# Altium PCB PCB1.PcbDoc
Units mm, origin at the board's own origin, x right, y up, seen from the top; angles counter-clockwise.
Board outline 80.01 x 80.01 mm, 2 copper layers (Top Layer, Bottom Layer), stack 1.671 mm thick; 36 components, 24 nets, 141 pads, 4 vias.
Unrouted connection lines stored in the file: 68.
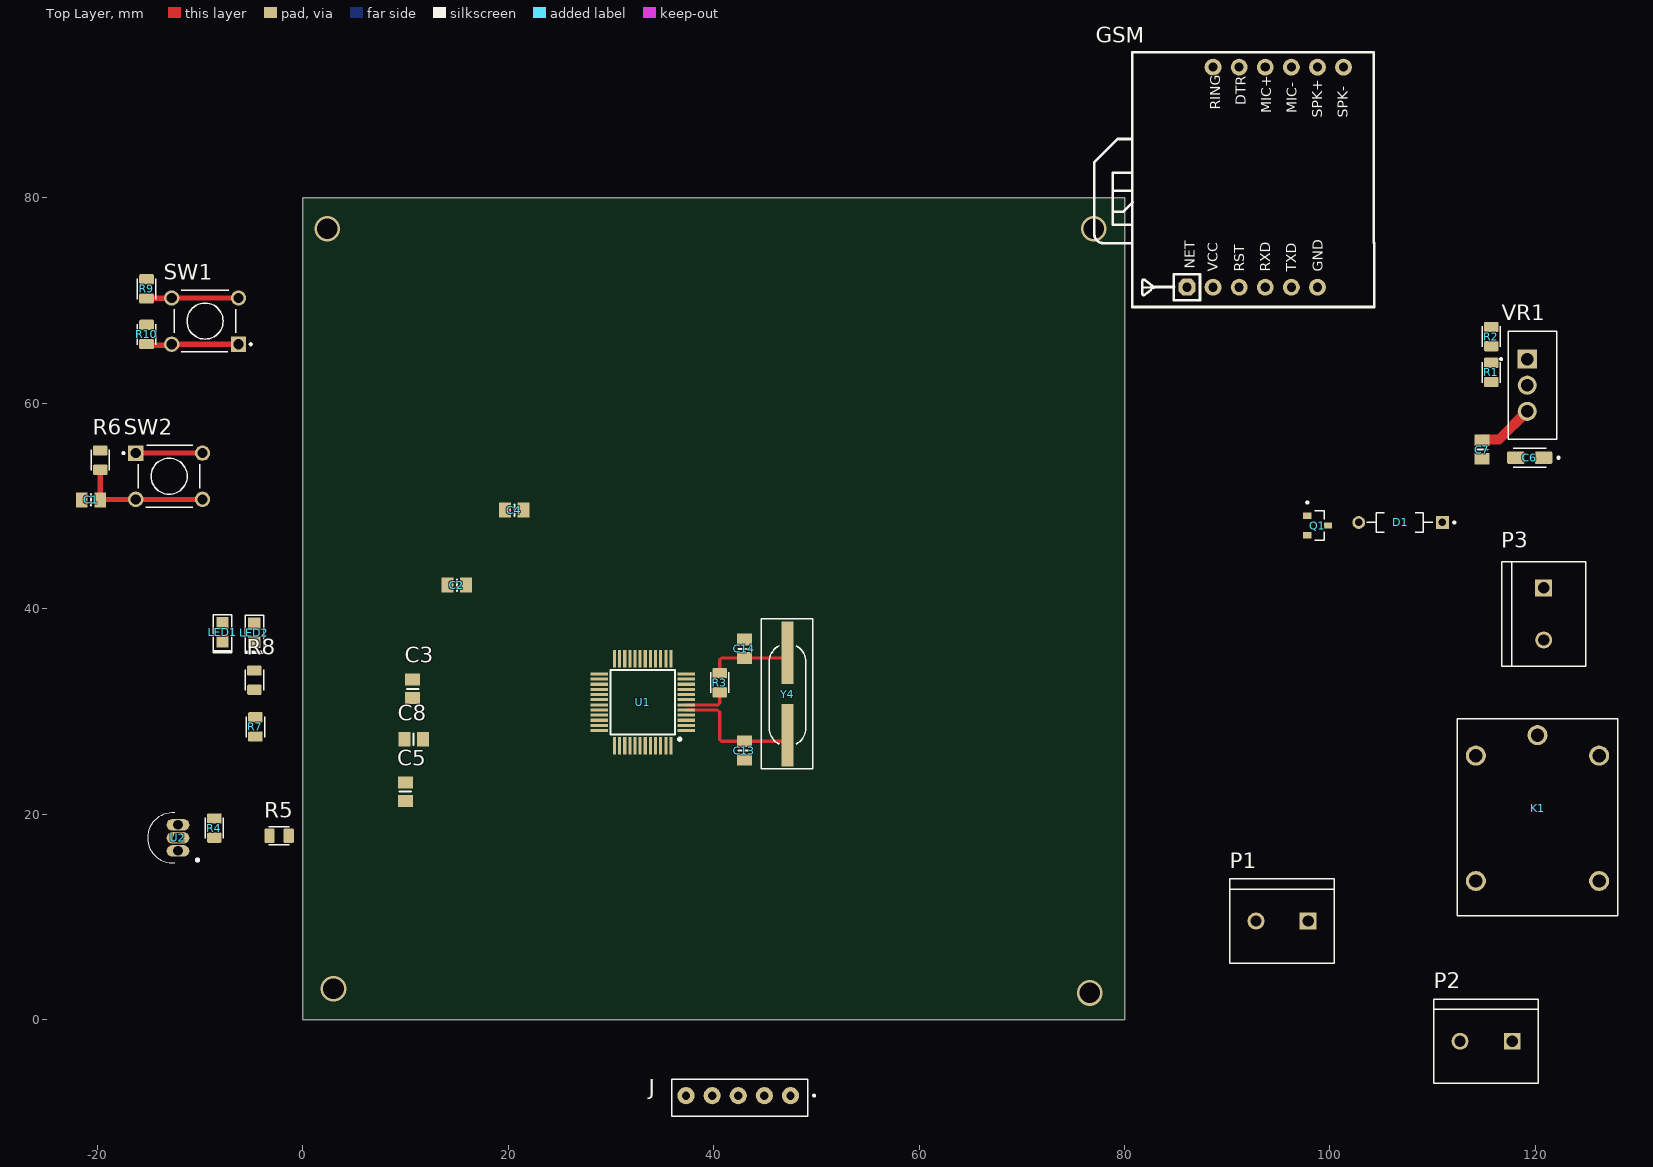
[diagram p0: Top Layer view]
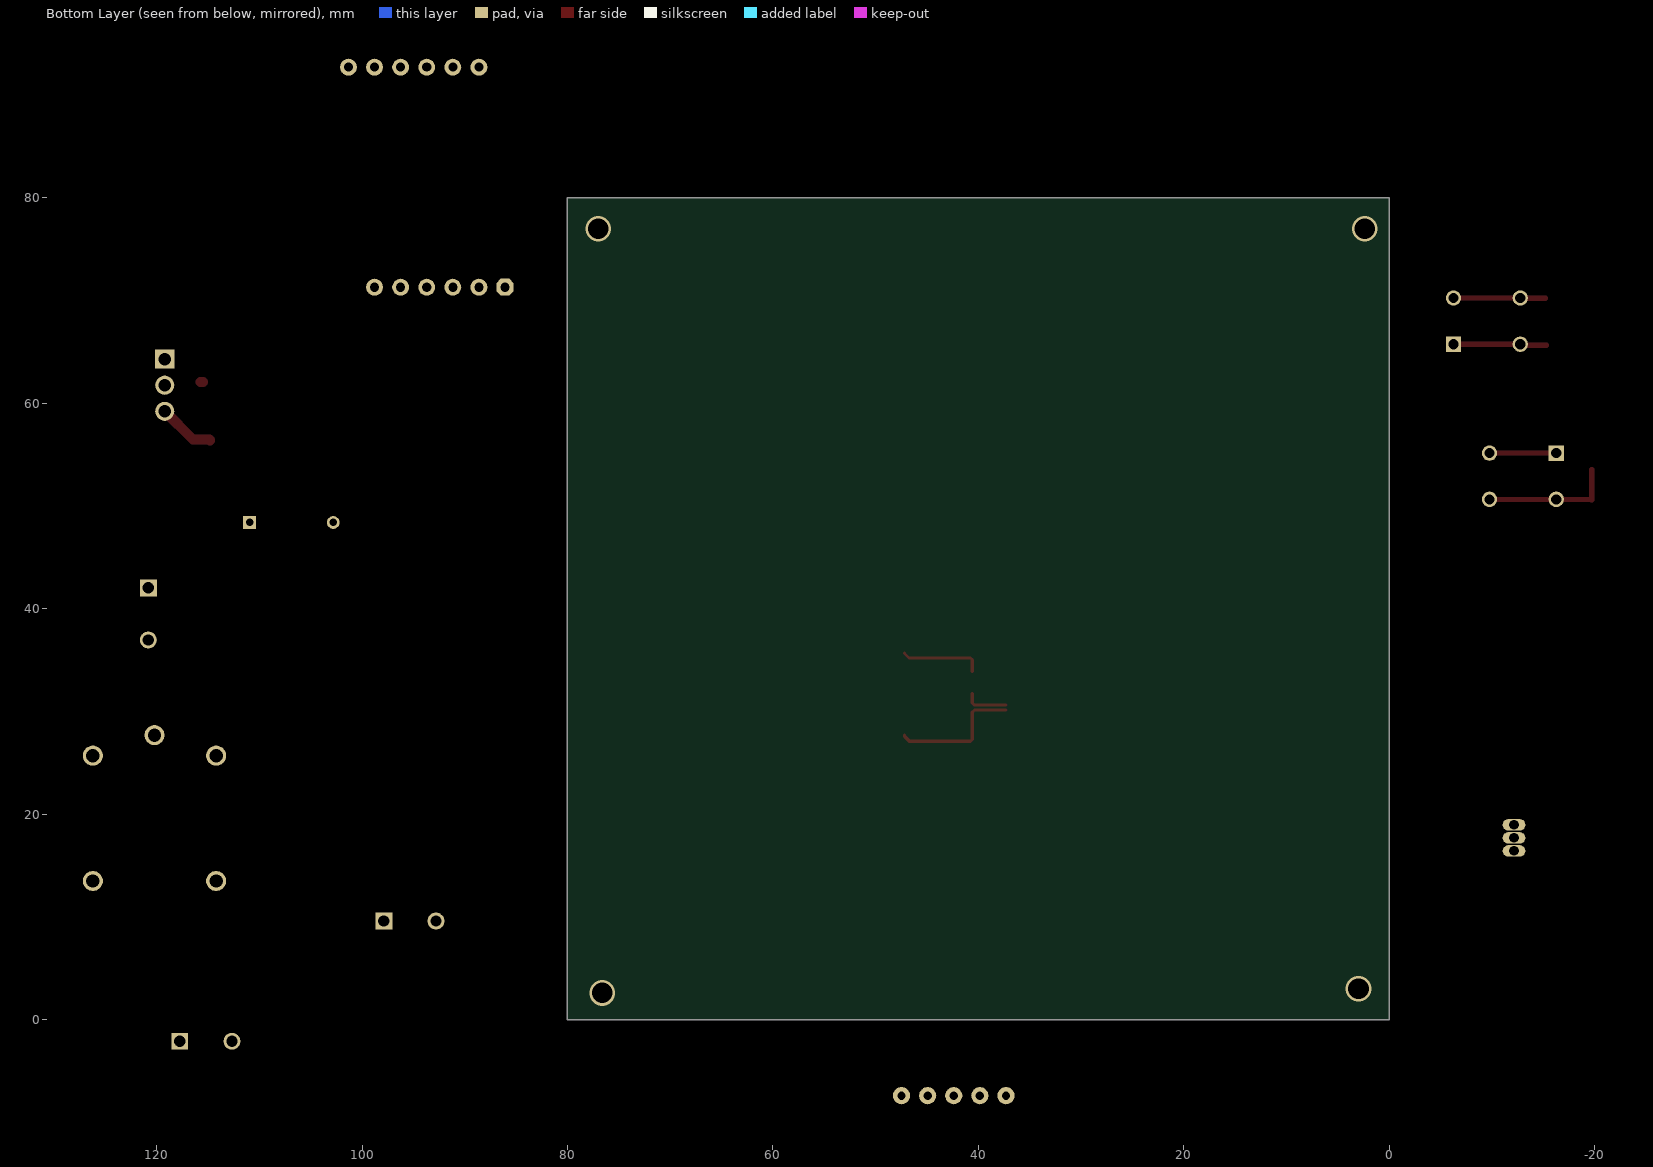
[diagram p1: Bottom Layer view, seen from below]

## Layer stack, top to bottom
Top Solder: solder mask 0.0102, Solder Resist, Dk 3.5
Top Layer: signal copper 0.0356
Dielectric 1: dielectric 1.6, FR-4, Dk 4.8
Bottom Layer: signal copper 0.0356
Bottom Solder: solder mask 0.0102, Solder Resist, Dk 3.5

## Board outline
0,0 80.01,0 80.01,80.01 0,80.01

## Design rules (kind name [scope] priority, off if disabled: settings)
Clearance [All] p1: gap=0.2 ignorepadtopadclearanceinfootprint=TRUE
PolygonConnect [All] p1: connectstyle=Relief reliefconductorwidth=0.254 reliefentries=4 polygonreliefangle="90 Angle" airgapwidth=0.254
RoutingVias [All] p1: holewidth=0.3 width=0.6 viastyle="Through Hole" minholewidth=0.3 minwidth=0.6 maxholewidth=0.3 maxwidth=0.6
SolderMaskExpansion [All] p1: expansion=0.102 istentingtop=FALSE
Width [All] p1: maxlimit=1 minlimit=0.3 preferedwidth=0.5
30 further rules are at their usual default settings.

## Components (designator, comment, footprint, x,y, rotation, side; value= is the part's Value field where it differs from the comment)
C1 "0.1uF" CAP_0805 -20.6,50.6 r0 top
C2 "0.1uF" CAP_0805 15,42.3 r180 top
C3 "0.1uF" CAP_0805 10.7,32.2 r90 top
C4 "0.1uF" CAP_0805 20.6,49.6 r0 top
C5 "0.1uF" CAP_0805 10,22.2 r90 top
C6 "T491A105K016AT" "CAPMP3216X180N - DUPLICATE" 119.45,54.7 r180 top
C7 "0.1uF" CAP_0805 114.8,55.5 r90 top
C8 "4.7uF" CAP_0805 10.8,27.3 r0 top
C13 "22pF" CAP_0805 43,26.2 r90 top
C14 "22pF" CAP_0805 43,36.1 r270 top
D1 "" DIOAD829W49L456D191 106.8,48.4 r180 top
GSM "SIM800L" SIM800L 98.78,71.3 r90 top
J "292161-5" TE_292161-5 47.48,-7.4 r0 top
K1 "SRD-03VDC-SL-C" RELAY_SRD-03VDC-SL-C 120.2,19.7 r270 top
LED1 "RED LED" LED_0805 -7.8,37.7 r90 top
LED2 "RED LED" LED_0805 -4.7,37.65 r90 top
P1 "282837-2" TE_282837-2 95.34,9.6 r180 top
P2 "282837-2" TE_282837-2 115.2,-2.1 r180 top
P3 "282837-2" TE_282837-2 120.8,39.5 r270 top
Q1 "SS8050-G" TRANS_SS8050-G 98.8,48.1 r0 top
R1 "220R" RES_0805 115.7,63 r270 top
R2 "390R" RES_0805 115.7,66.5 r270 top
R3 "220R" RES_0805 40.6,32.8 r270 top
R4 "1K" RES_0805 -8.6,18.65 r270 top
R5 "1K" RES_0805 -2.3,17.9 r180 top
R6 "10K" RES_0805 -19.7,54.465 r90 top
R7 "220K" RES_0805 -4.6,28.5 r270 top
R8 "10K" RES_0805 -4.7,33.05 r270 top
R9 "10K" RES_0805 -15.2,71.135 r90 top
R10 "4.7K" RES_0805 -15.2,66.7 r270 top
SW1 "1825910-6" SW_1825910-6-4 -9.5,68 r180 top
SW2 "1825910-6" SW_1825910-6-4 -13,52.9 r0 top
U1 "STM32F103C6T6" LQFP-48_19.6_393_58X11_SMD 33.1,30.9 r180 top
U2 "DS18B20" TO-92-TO92127P495H2044-3 -12.9,17.7 r90 top
VR1 "LM317T" TO254P1054X470X1955-3 119.2,61.76 r270 top
Y4 "8MHz" XTAL_314_240X47_SMD 47.2,27.7 r90 top

## Footprints (in the part's own frame and the unit in brackets; to place one, negate y for a bottom-side part, rotate by r counter-clockwise, add the part's x,y. Pads: shape width x height; smd on the part's side, far side on the other; paste and mask are expansions set on the pad)
CAP_0805 [mm]
  rect 1.15x1.45 smd: 1(-0.9,0) 2(0.9,0)
  silkscreen extent 0,-0.55 0,0.55, body extent -1,-0.63 1,0.63, height 0.78
"CAPMP3216X180N - DUPLICATE" [mm]
  rrect25% 1.71x1.23 smd: 1(-1.35,0) 2(1.35,0)
  silkscreen extent -2.9,-0.93 1.6,0.93
DIOAD829W49L456D191 [mm]
  round 1.238 hole 0.73: A(4,0)
  rect 1.238x1.238 / inner round 1.238 / far side rect 1.238x1.238 hole 0.73: C(-4.146,0)
  silkscreen extent -5.4,-0.96 3.2,0.96, body extent -4.24,-1 4.24,1, height 2
LED_0805 [mm] "LED"
  rect 1.2x1.2 smd mask+0.076: A(0.889,0) K(-0.889,0)
  silkscreen extent -1.99,-0.89 1.73,0.89, body extent -1.01,-0.62 1.01,0.63, height 1.1
LQFP-48_19.6_393_58X11_SMD [mm] "48LQFP"
  rect 1.7x0.3 smd mask+0.076: 1(-4.238,2.75) 2(-4.238,2.25) 3(-4.238,1.75) 4(-4.238,1.25) 5(-4.238,0.75) 6(-4.238,0.25) 7(-4.238,-0.25) 8(-4.238,-0.75) 9(-4.238,-1.25) 10(-4.238,-1.75) 11(-4.238,-2.25) 12(-4.238,-2.75) 25(4.238,-2.75) 26(4.238,-2.25) 27(4.238,-1.75) 28(4.238,-1.25) 29(4.238,-0.75) 30(4.238,-0.25) 31(4.238,0.25) 32(4.238,0.75) 33(4.238,1.25) 34(4.238,1.75) 35(4.238,2.25) 36(4.238,2.75)
  rect 0.3x1.7 smd mask+0.076: 13(-2.75,-4.238) 14(-2.25,-4.238) 15(-1.75,-4.238) 16(-1.25,-4.238) 17(-0.75,-4.238) 18(-0.25,-4.238) 19(0.25,-4.238) 20(0.75,-4.238) 21(1.25,-4.238) 22(1.75,-4.238) 23(2.25,-4.238) 24(2.75,-4.238) 37(2.75,4.238) 38(2.25,4.238) 39(1.75,4.238) 40(1.25,4.238) 41(0.75,4.238) 42(0.25,4.238) 43(-0.25,4.238) 44(-0.75,4.238) 45(-1.25,4.238) 46(-1.75,4.238) 47(-2.25,4.238) 48(-2.75,4.238)
  silkscreen extent -3.73,-3.15 3.15,3.72, body extent -4.5,-4.5 4.5,4.5, height 1.7
RELAY_SRD-03VDC-SL-C [mm]
  round 1.95 hole 1.3: COIL1(-6,6) COIL2(-6,-6) COM(-8,0) NC(6.2,6) NO(6.2,-6)
  silkscreen extent -9.6,-7.8 9.6,7.8, body extent -9.6,-7.8 9.6,7.8, height 15.8
RES_0805 [mm]
  rrect25% 1x1.42 smd: 1(-0.935,0) 2(0.935,0)
  silkscreen extent -1,-0.89 1,0.89, body extent -1,-0.63 1,0.63, height 0.78
SIM800L [mil]
  oct 65x65 hole 35: 0(0,500)
  round 65 hole 35: 1(0,400) 2(0,300) 3(0,200) 4(0,100) 5(0,0) 6(843.31,-100) 7(843.31,0) 8(843.31,100) 9(843.31,200) 10(843.31,300) 11(843.31,400)
  silkscreen extent -76,-218 900,855, body extent -71,-218 907,699, height 279
SW_1825910-6-4 [mm]
  rect 1.498x1.498 hole 0.99: 1(-3.25,2.25)
  round 1.498 hole 0.99: 2(3.25,2.25) 3(-3.25,-2.25) 4(3.25,-2.25)
  silkscreen extent -4.54,-3 3,3, body extent -3.9,-3 3.9,3, height 5.01
TE_282837-2 [mm]
  rect 1.65x1.65 / inner round 1.65 / far side rect 1.65x1.65 hole 1.1: 1(-2.54,0)
  round 1.65 hole 1.1: 2(2.54,0)
  silkscreen extent -5.08,-4.1 5.08,4.1, body extent -5.68,0 5.08,8.2, height 7.25
TE_292161-5 [mil]
  round 66 hole 32: 1(0,0) 2(-100,0) 3(-200,0) 4(-300,0) 5(-400,0)
  silkscreen extent -454,-79 95,63, body extent -447,-269 53,50, height 420
TO254P1054X470X1955-3 [mm]
  rect 1.86x1.86 / inner round 1.86 / far side rect 1.86x1.86 hole 1.24: 1(-2.54,0)
  round 1.86 hole 1.24: 2(0,0) 3(2.54,0)
  silkscreen extent -5.27,-2.64 5.27,2.86, body extent -5.08,-1.49 5.08,2.71, height 22.86
TO-92-TO92127P495H2044-3 [mm]
  oval 1.11x2.22 hole 0.93: 1(-1.27,-0.76) 2(0,-0.76) 3(1.27,-0.76)
  silkscreen extent -2.43,-2.8 2.43,2.2, body extent -2.28,-1.14 2.28,2.48, height 20.45
TRANS_SS8050-G [mm]
  rect 0.8x0.6 smd: 1(-1.01,0.95) 2(-1.01,-0.95) 3(1.01,0)
  silkscreen extent -1.11,-1.45 0.65,2.35, body extent -1.2,-1.45 1.2,1.45, height 1.14
XTAL_314_240X47_SMD [mm] "CASE: TH"
  rect 6.096x1.2 smd: 1(0,0) 2(8,0)
  silkscreen extent -3.29,-2.44 11.32,2.57, body extent -2.99,-2.27 10.9,2.41, height 3.05

## Part data
C1 C2 C3 C4 C5 C7: library part CAP_0.1uF-50V-5%-0805, "0.1µF ±5% 50V Ceramic Capacitor X7R 0805 (2012 Metric)", Case/Package="0805 (2012 Metric)", Manufacturer=KEMET, Manufacturing Part Number=C0805C104J5RACTU, Supplier Part Number-1=399-1171-1-ND, Supplier-1=Digikey
C6: "1ÂµF Molded Tantalum Capacitors 16V 1206 (3216 Metric) 10Ohm", Package="1206 Kemet", Availability=Warning, Check_prices=https://www.snapeda.com/parts/T491A105K016AT/Kemet/view-part/31713/?ref=eda, MF=Kemet, MP=T491A105K016AT, Price=None, Purchase-URL=https://pricing.snapeda.com/search/part/T491A105K016AT/?ref=eda, SnapEDA_Link=https://www.snapeda.com/parts/T491A105K016AT/Kemet/view-part/31713/?ref=snap
C8: library part CAP_4.7uF-50V-5%-0805_1, "0.1µF ±5% 50V Ceramic Capacitor X7R 0805 (2012 Metric)", Case/Package="0805 (2012 Metric)", Manufacturer=KEMET, Manufacturing Part Number=C0805C104J5RACTU, Supplier Part Number-1=399-1171-1-ND, Supplier-1=Digikey
C13 C14: library part CAP_22pF-50V-5%-0805, "22pF ±5% 50V Ceramic Capacitor C0G, NP0 0805 (2012 Metric)", Case/Package=0805, Manufacturer=KEMET, Manufacturer Part Number=C0805C220J5GACTU, Supplier Part Number-1=399-1113-1-ND, Supplier-1=Digikey
D1: library part 1N4148, "Diode Standard 75V 200mA Surface Mount SOD-523F"
J: "Wire-To-Board Connector, Vertical, AMP CT Series, Through Hole, Header, 5, 2 mm", Package=None, Availability=Good, DigiKey-Purchase-URL=https://snapeda.com/shop?store=DigiKey&id=779050, EU_RoHS_Compliance=Compliant, MF="TE Connectivity", Mouser-Purchase-URL=https://snapeda.com/shop?store=Mouser&id=779050, MP=292161-5, Price=None, SnapEDA_Link=https://www.snapeda.com/parts/292161-5/TE%20Connectivity%20AMP%20Connectors/view-part/779050/?ref=snap
K1: "Relays General Purpose Non Latching 3VDC SPDT 10A (250VAC) Max 5PIN", Package=Package, Availability="Not in stock", Check_prices=https://www.snapeda.com/parts/SRD-03VDC-SL-C/Songle+Relay/view-part/?ref=eda, MF="Songle Relay", MP=SRD-03VDC-SL-C, Price=None, SnapEDA_Link=https://www.snapeda.com/parts/SRD-03VDC-SL-C/Songle+Relay/view-part/?ref=snap
LED1 LED2: library part LED-RED_10mA-0805, "Red 621nm LED Indication - Discrete 2V 0805 (2012 Metric)", Case/ Package=0805, Manufacturer="Lite-On Inc.", Manufacturer Part Number=LTST-C170EKT, Supplier Part Number-1=160-1178-1-ND, Supplier-1=Digikey
P1 P2 P3: "Connector Terminal Blocks Receptacle 2 Position 5.08mm Solder Straight Thru-Hole 13.5A/Contact", Package=None, Availability="In Stock", Check_prices=https://www.snapeda.com/parts/282837-2/TE+Connectivity+AMP+Connectors/view-part/?ref=eda, MF="TE Connectivity", MP=282837-2, Price=None, Purchase-URL=https://pricing.snapeda.com/search/part/282837-2/?ref=eda, SnapEDA_Link=https://www.snapeda.com/parts/282837-2/TE+Connectivity+AMP+Connectors/view-part/?ref=snap
Q1: "Bipolar (BJT) Transistor NPN 25 V 1.5 A 100MHz 300 mW Surface Mount SOT-23-3", Package=None, Check_prices=https://www.snapeda.com/parts/SS8050G/Comchip/view-part/?ref=eda, Digi-Key_Part_Number=641-1790-2-ND, MF=Comchip, MP=SS8050G, SnapEDA_Link=https://www.snapeda.com/parts/SS8050G/Comchip/view-part/?ref=snap
R1 R3 R9: library part RES_220R-0.125W-1%-0805_1_1_1, "220 Ohms ±1% 0.125W, 1/8W Chip Resistor 0805 (2012 Metric) Thick Film", Case/Package=0805, Manufacturer="TE Connectivity Passive Product", Manufacturing Part Number=CRG0805F1K5, Supplier Part Number-1=A106057CT-ND, Supplier-1=Digikey
R2: library part RES_390R-0.125W-1%-0805_1_1, "390Ohms ±1% 0.125W, 1/8W Chip Resistor 0805 (2012 Metric) Thick Film", Case/Package=0805, Manufacturer="TE Connectivity Passive Product", Manufacturing Part Number=CRG0805F1K5, Supplier Part Number-1=A106057CT-ND, Supplier-1=Digikey
R4 R10: library part RES_4.7K-0.125W-1%-0805, "4.7 kOhms ±1% 0.125W, 1/8W Chip Resistor 0805 (2012 Metric) Thick Film", Case/Package=0805, Manufacturer="TE Connectivity Passive Product", Manufacturing Part Number=CRG0805F1K5, Supplier Part Number-1=A106057CT-ND, Supplier-1=Digikey
R5 R6 R8: library part RES_10K-0.125W-1%-0805, "10 kOhms ±1% 0.125W, 1/8W Chip Resistor 0805 (2012 Metric) Moisture Resistant Thick Film", Case/Package=0805, Manufacturer=Yageo, Manufacturing Part Number=RC0805FR-0710KL, Supplier Part Number-1=311-10.0KCRCT-ND, Supplier-1=Digikey
R7: library part RES_1K-0.125W-1%-0805, "1 kOhms ±1% 0.125W, 1/8W Chip Resistor 0805 (2012 Metric) Moisture Resistant Thick Film", Case/Package=0805, Manufacturer=垈㎵á, Manufacturer Part Number=RC0805FR-071KL, Supplier Part Number-1=311-1.00KCRCT-ND, Supplier-1=Digikey
SW1 SW2: "Switch Tactile OFF (ON) SPST Round Button PC Pins 0.05A 24VDC 100000Cycles 1.57N Thru-Hole Loose", Package=None, Availability=Unavailable, MP=1825910-6, Price=None
U1: library part "IC-STM32F103C6T6 _1", "ARM® Cortex®-M3 STM32F1 Microcontroller IC 32-Bit 72MHz 64KB (64K x 8) FLASH", Case/Package=48-LQFP, Manufacturer=STMicroelectronics, Manufacturer Part Number=STM32F103C8T6, Supplier Part Number-1=497-6063-ND, Supplier-1=Digikey
U2: "Temperature Sensor Digital, Local -55Â°C ~ 125Â°C 12 b 8-uMAX-EP", Package="TO-226-3 Maxim", Availability="In Stock", Check_prices=https://www.snapeda.com/parts/DS18B20/Maxim+Integrated/view-part/?ref=eda, MF=Maxim, MP=DS18B20, Price=None, Purchase-URL=https://pricing.snapeda.com/search/part/DS18B20/?ref=eda, SnapEDA_Link=https://www.snapeda.com/parts/DS18B20/Maxim+Integrated/view-part/?ref=snap
VR1: "1.5-A, 40-V, adjustable linear voltage regulator 3-TO-220", Package="TO-220-3 Texas Instruments", Availability="In Stock", Check_prices=https://www.snapeda.com/parts/LM317T/Texas+Instruments/view-part/?ref=eda, MF="Texas Instruments", MP=LM317T, Price=None, Purchase-URL=https://pricing.snapeda.com/search/part/LM317T/?ref=eda, SnapEDA_Link=https://www.snapeda.com/parts/LM317T/Texas+Instruments/view-part/?ref=snap
Y4: library part XTAL_8MHZ-LFXTAL030234, "Crystals 8MHz 22pF -20C 70C", Case/Package=SMD, Manufacturer="IQD Frequency Products", Manufacturing Part Number=LFXTAL030234Reel, Supplier Part Number-1=449-LFXTAL030234REEL, Supplier-1=Mouser

## Via types
v1: diameter 2.5, hole 2, Top Layer to Bottom Layer, 4 vias

## Nets (pads, with @x,y where several pads share a name; then routed paths per layer and width w, separated by ;. In a path a pad name is that pad's centre, name@x,y a point inside that pad or via, vN(x,y) a via of type N, cw(c..) or ccw(c..) an arc to the next point about the centre after c; other vN are vias at no path point)
+5V: C7.2 D1.C K1.COIL1 P3.1 VR1.3 | length 5.6
  Top Layer w1: C7.2 114.875,56.475 116.455,56.475 VR1.3
COM: K1.COM P2.1
GND: C1.1 C2.1 C3.1 C4.1 C5.1 C6.2 C7.1 C8.1 C13.1 C14.1 GSM.5 J.5 P1.2 P2.2 P3.2 Q1.2 R2.1 R7.1 R10.1 SW2.1 SW2.2 U1.8 U1.23 U1.35 U1.47 U2.1 | length 6.5
  Top Layer w0.5: SW2.1 SW2.2
NetC14_2: C14.2 R3.1 Y4.2 | length 8
  Top Layer w0.3: R3.1@40.6,33.909 40.6,35.024 40.776,35.2 46.75,35.2 47.2,35.65 Y4.2
NetD1_A: D1.A K1.COIL2 Q1.3
NetGSM_2: GSM.2 U1.19
NetGSM_3: GSM.3 U1.21
NetGSM_4: GSM.4 U1.22
NetLED1_K: LED1.K R7.2
NetLED2_K: LED2.K R8.2
NetQ1_1: Q1.1 R5.2
NetR1_1: R1.1 R2.2 VR1.1
NetR9_1: R9.1 SW1.3 SW1.4 | length 9
  Top Layer w0.5: R9.1 -15.175,70.225 -12.775,70.225 SW1.4 SW1.3
NO: K1.NO P1.1
NRST: C1.2 J.4 R6.1 SW2.3 SW2.4 U1.7 | length 12.9
  Top Layer w0.5: R6.1 C1.2 -19.675,50.625 -16.275,50.625 SW2.3 SW2.4
PA2: R4.1 U1.12 U2.2
PB0: R5.1 U1.18
PB7: R10.2 SW1.1 SW1.2 U1.43 | length 9.1
  Top Layer w0.5: R10.2@-15.3,65.65 -12.85,65.65 SW1.2 SW1.1
PC13: R8.1 U1.2
SWCLK: J.2 U1.37
SWDIO: J.3 U1.34
VCC: C2.2 C3.2 C4.2 C5.2 C6.1 C8.2 GSM.1 J.1 LED1.A LED2.A R1.2 R4.2 R6.2 R9.2 U1.1 U1.9 U1.24 U1.36 U1.48 U2.3 VR1.2 | length 0.2
  Top Layer w1: R1.2@115.49,62.065 R1.2
XTALA: C13.2 U1.5 Y4.1 | length 13.7
  Top Layer w0.3: U1.5 40.374,30.15 40.6,29.924 40.6,27.276 40.776,27.1 C13.2 46.75,27.1 47.2,27.55 Y4.1 47.2,27.65 Y4.1@46.75,27.2
XTALB: R3.2 U1.6 | length 4.3
  Top Layer w0.3: U1.6 40.424,30.65 40.6,30.826 R3.2@40.6,31.75
pads on no net: GSM.0 GSM.6 GSM.7 GSM.8 GSM.9 GSM.10 GSM.11 K1.NC U1.3 U1.4 U1.10 U1.11 U1.13 U1.14 U1.15 U1.16 U1.17 U1.20 U1.25 U1.26 U1.27 U1.28 U1.29 U1.30 U1.31 U1.32 U1.33 U1.38 U1.39 U1.40 U1.41 U1.42 U1.44 U1.45 U1.46
copper on no net:
  other v1: 76.6,2.6 3,3 2.4,77 77,77

## Text inside footprints (layer, text, board x,y; h text height)
GSM: Top Overlay "SPK-" at 101.752,87.81 h1 r90; Top Overlay "SPK+" at 99.263,87.81 h1 r90; Top Overlay "MIC-" at 96.773,88.229 h1 r90; Top Overlay "MIC+" at 94.284,88.229 h1 r90; Top Overlay "DTR" at 91.795,88.995 h1 r90; Top Overlay "RING" at 89.306,88.581 h1 r90; Top Overlay "NET" at 86.842,73.078 h1 r90; Top Overlay "VCC" at 89.077,72.799 h1 r90; Top Overlay "RST" at 91.63,72.799 h1 r90; Top Overlay "RXD" at 94.183,72.799 h1 r90; Top Overlay "TXD" at 96.735,72.799 h1 r90; Top Overlay "GND" at 99.288,72.799 h1 r90